# Altium PCB mSAS_BNC_fanout.PCBDOC
Units mm, origin at the board's own origin, x right, y up, seen from the top; angles counter-clockwise.
Board outline 107.36 x 57.36 mm, 2 copper layers (TopLayer, BottomLayer), stack 1.571 mm thick; 68 components, 47 nets, 208 pads, 796 vias.
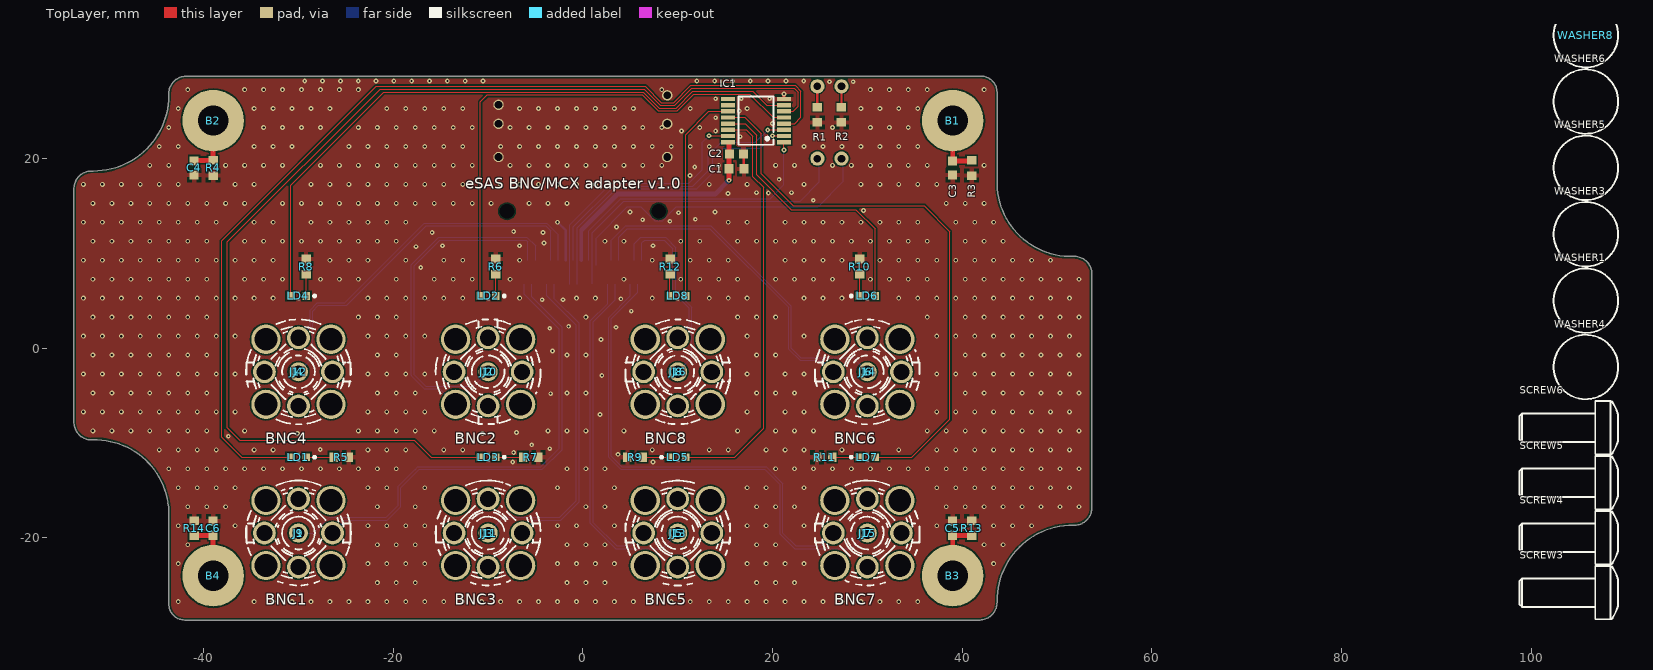
[diagram p0: TopLayer view]
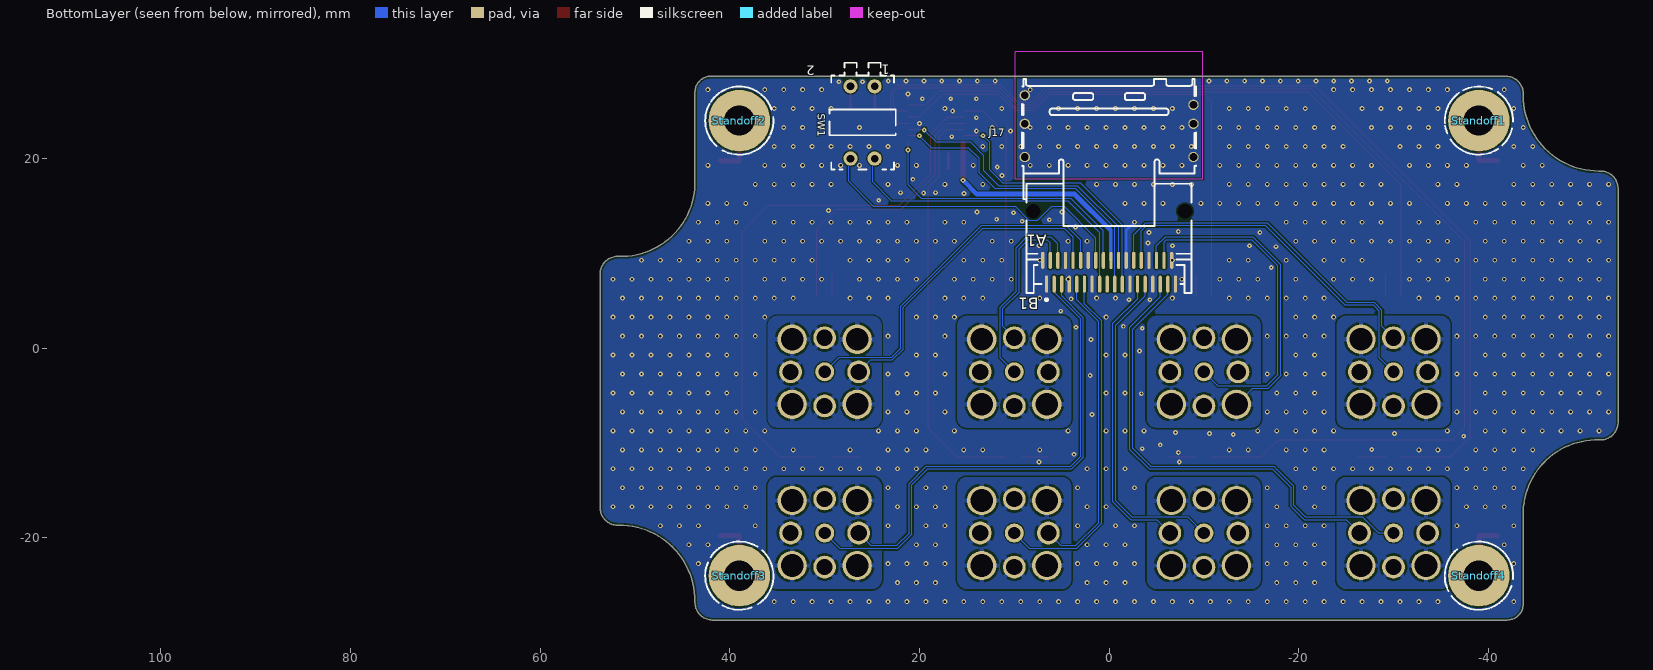
[diagram p1: BottomLayer view, seen from below]

## Layer stack, top to bottom
TopSolder: solder mask 0.0102, Solder Resist, Dk 3.5
TopLayer: signal copper 0.0356
Dielectric 3: prepreg 1.5, Dk 4.2
BottomLayer: signal copper 0.0356
BottomSolder: solder mask 0.0102, Solder Resist, Dk 3.5

## Board outline
-43.678,-26.986 -43.678,-17.288 -43.679,-17.262 ccw(c-51.476,-17.476) -51.691,-9.678 -51.727,-9.679 cw(c-51.825,-7.825) -53.671,-8.025 -53.678,-7.908 -53.678,16.907 -53.671,17.025 cw(c-51.826,16.825) -51.727,18.679 -51.651,18.677 ccw(c-51.651,26.651) -43.677,26.651 -43.679,26.728 cw(c-41.825,26.826) -42.025,28.671 -41.908,28.678 42,28.678 42.006,28.677 cw(c42,27) 43.677,27.006 43.678,27 43.678,17.302 43.679,17.262 ccw(c51.476,17.476) 51.691,9.679 51.727,9.679 cw(c51.826,7.825) 53.671,8.025 53.678,8 53.678,-16.907 53.679,-16.923 cw(c51.826,-16.825) 51.728,-18.679 51.717,-18.677 ccw(c51.651,-26.651) 43.678,-26.717 43.682,-26.825 cw(c41.825,-26.825) 42.025,-28.671 41.908,-28.678 -42,-28.678 -42.006,-28.677 cw(c-42,-27)

## Design rules (kind name [scope] priority, off if disabled: settings)
BoardOutlineClearance [All] p1: gap=0.254 ignorepadtopadclearanceinfootprint=FALSE except(0: Arc-SplitContinuation Track-SplitContinuation SMDPad-SplitContinuation THPad-SplitContinuation Via-SplitContinuation Fill-SplitContinuation Poly-SplitContinuation Region-SplitContinuation Text-SplitContinuation)
Clearance [All] p1: gap=0.152 ignorepadtopadclearanceinfootprint=FALSE
ComponentClearance ComponentClearance_standof_MH [HasFootprint('ETTINGER_005.13.103') vs HasFootprint('MTG270_500')] p1: gap=0.254 collisioncheckmode=3 verticalgap=-7 showdistances=FALSE
ComponentClearance ComponentClearance_BNC_SPX [HasFootprint('AMPHENOL_919-109J-51PX') vs HasFootprint('TYCO_5-1634506-1')] p2: gap=-10 collisioncheckmode=3 verticalgap=2540 showdistances=TRUE
ComponentClearance [All] p3: gap=0 collisioncheckmode=3 verticalgap=2540 showdistances=FALSE
DiffPairsRouting [InDifferentialPairClass('All Differential Pairs')] p1: maxlimit=0.127 minlimit=0.127 mostfreqgap=0.127 toplayer_minwidth=3.822 toplayer_maxwidth=3.822 toplayer_prefwidth=3.822 bottomlayer_minwidth=3.822 bottomlayer_maxwidth=3.822 bottomlayer_prefwidth=3.822 impedanceprofiledriven=TRUE impedanceprofileid={AE919443-835C-48A8-A9B8-3D3E97AE2A3C} impedanceprofilevalue=50.000000 maxuncoupledlength=12.7
FabricationTestPointUsage TestPointUsage [All] p1: valid=0 allowmultiple=FALSE
FabricationTestpoint Testpoint [All] p1: side=3 testpointundercomponent=TRUE minsize=1.016 maxsize=2.54 preferedsize=1.524 minholesize=0.508 maxholesize=1.016 preferedholesize=0.813 testpointgrid=0.025 allowsidetop=TRUE allowsidebottom=TRUE usegrid=TRUE gridtolerance=0
Height [All] p1: minheight=0 maxheight=40 prefheight=40
HoleSize [All] p1: absolutevalues=TRUE maxlimit=3.81 minlimit=0.025 maxpercent=80.000 minpercent=20.000
HoleToHoleClearance HoleToHoleClearance_standoff_to_MH [HasFootprint('MTG270_500') vs HasFootprint('ETTINGER_005.13.103')] p1: gap=-7 allowstackedmicrovias=TRUE
HoleToHoleClearance HoleToHoleClearance_BNC_ZPX [HasFootprint('AMPHENOL_919-109J-51PX') vs HasFootprint('TYCO_5-1634506-1')] p2: gap=-10 allowstackedmicrovias=TRUE
HoleToHoleClearance [All] p3: gap=0.025 allowstackedmicrovias=TRUE
MinimumSolderMaskSliver [All] p1: minsoldermaskwidth=0
PlaneClearance [All] p1: clearance=0.2
PlaneConnect [All] p1: planeconnectstyle=Direct reliefexpansion=0.508 reliefentries=4 reliefconductorwidth=0.254 reliefairgap=0.254
PolygonConnect PolygonConnect_eSAS [All vs HasFootprint('MOLEX_75783-0107')] p1: connectstyle=Direct reliefconductorwidth=0.254 reliefentries=4 polygonreliefangle="90 Angle" airgapwidth=0.254
PolygonConnect PolygonConnect_pad [(InPadClass('All Pads'))] p2: connectstyle=Relief reliefconductorwidth=0.5 reliefentries=4 polygonreliefangle="90 Angle" airgapwidth=0.254
PolygonConnect [All] p3: connectstyle=Direct reliefconductorwidth=0.254 reliefentries=4 polygonreliefangle="45 Angle" airgapwidth=0.254
RoutingVias [All] p1: holewidth=0.2 width=0.5 viastyle="Through Hole" minholewidth=0.2 minwidth=0.5 maxholewidth=0.711 maxwidth=1.27
SilkToSilkClearance [All] p1: silktosilkclearance=0
SilkToSolderMaskClearance SilkscreenOverComponentPads [IsPad] p1: minsilkscreentomaskgap=0 clearancetoexposedcopper=TRUE
SolderMaskExpansion [All] p1: expansion=0.051 istentingtop=FALSE
SupplyNets "Schematic Supply Nets" [InNet('AFE0_CSN1')] p1 off: voltage=0.000
SupplyNets "Schematic Supply Nets_2" [InNet('GND')] p2 off: voltage=0.000
ViasUnderSMD [All] p1 off: allowed=FALSE
Width [All] p1: maxlimit=1.27 minlimit=0.127 preferedwidth=0.127
18 further rules are at their usual default settings.

## Components (designator, comment, footprint, x,y, rotation, side; value= is the part's Value field where it differs from the comment)
B1 "Plated Hole" MTG270_500 39,24 r0 top
B2 "Plated Hole" MTG270_500 -39,24 r0 top
B3 "Plated Hole" MTG270_500 39,-24 r0 top
B4 "Plated Hole" MTG270_500 -39,-24 r0 top
C1 "100nF" CAPC1608X87N 16.2,18.9 r180 top
C2 "22uF" CAPC1608X90N 16.2,20.5 r180 top
C3 "100nF" CAPC1608X90N 39,19 r270 top
C4 "100nF" CAPC1608X90N -41,19 r270 top
C5 "100nF" CAPC1608X90N 39,-19 r90 top
C6 "100nF" CAPC1608X90N -39,-19 r90 top
IC1 "CD74HC4094PW" SOP65P640X120-16N 18.25,24 r180 top
J1 "BNC" TYCO_5-1634506-1 -30,-19.5 r180 top
J2 "BNC" TYCO_5-1634506-1 -10,-2.5 r270 top
J3 "BNC" TYCO_5-1634506-1 -10,-19.5 r180 top
J4 "BNC" TYCO_5-1634506-1 -30,-2.5 r180 top
J5 "BNC" TYCO_5-1634506-1 10,-19.5 r180 top
J6 "BNC" TYCO_5-1634506-1 30,-2.5 r180 top
J7 "BNC" TYCO_5-1634506-1 30,-19.5 r180 top
J8 "BNC" TYCO_5-1634506-1 10,-2.5 r180 top
J9 "MCX" AMPHENOL_919-109J-51PX -30,-19.5 r45 top
J10 "MCX" AMPHENOL_919-109J-51PX -10,-2.5 r45 top
J11 "MCX" AMPHENOL_919-109J-51PX -10,-19.5 r45 top
J12 "MCX" AMPHENOL_919-109J-51PX -30,-2.5 r45 top
J13 "MCX" AMPHENOL_919-109J-51PX 10,-19.5 r45 top
J14 "MCX" AMPHENOL_919-109J-51PX 30,-2.5 r45 top
J15 "MCX" AMPHENOL_919-109J-51PX 30,-19.5 r45 top
J16 "MCX" AMPHENOL_919-109J-51PX 10,-2.5 r45 top
J17 "iPass™" MOLEX_75783-0107 0,8 r0 bottom locked
LD1 "Green" LED_KINGBRIGHT_KP-1608CGCK -30,-11.5 r180 top
LD2 "Green" LED_KINGBRIGHT_KP-1608CGCK -10,5.5 r180 top
LD3 "Green" LED_KINGBRIGHT_KP-1608CGCK -10,-11.5 r180 top
LD4 "Green" LED_KINGBRIGHT_KP-1608CGCK -30,5.5 r180 top
LD5 "Green" LED_KINGBRIGHT_KP-1608CGCK 10,-11.5 r0 top
LD6 "Green" LED_KINGBRIGHT_KP-1608CGCK 30,5.5 r0 top
LD7 "Green" LED_KINGBRIGHT_KP-1608CGCK 30,-11.5 r0 top
LD8 "Green" LED_KINGBRIGHT_KP-1608CGCK 10,5.5 r0 top
MECH1 "61000-007" GENERIC_MECH 88.569,-123.98 r90 top
R1 "1k" RESC1608X55N 24.73,24.61 r270 top
R2 "1k" RESC1608X55N 27.27,24.61 r270 top
R3 "1M" RESC1608X55N 41,19 r270 top
R4 "1M" RESC1608X55N -39,19 r270 top
R5 "750" RESC1608X55N -25.5,-11.5 r0 top
R6 "750" RESC1608X55N -9.2,8.6 r90 top
R7 "750" RESC1608X55N -5.5,-11.5 r0 top
R8 "750" RESC1608X55N -29.2,8.6 r90 top
R9 "750" RESC1608X55N 5.5,-11.5 r180 top
R10 "750" RESC1608X55N 29.2,8.6 r90 top
R11 "750" RESC1608X55N 25.5,-11.5 r180 top
R12 "750" RESC1608X55N 9.2,8.6 r90 top
R13 "1M" RESC1608X55N 41,-19 r90 top
R14 "1M" RESC1608X55N -41,-19 r90 top
SCREW3 "M3x8" BOSSARD_BN5687-3061606_h 106.775,-25.791 r0 top
SCREW4 "M3x8" BOSSARD_BN5687-3061606_h 106.775,-19.991 r0 top
SCREW5 "M3x8" BOSSARD_BN5687-3061606_h 106.775,-14.191 r0 top
SCREW6 "M3x8" BOSSARD_BN5687-3061606_h 106.775,-8.391 r0 top
Standoff1 "=Value" ETTINGER_005.13.103 -39,24 r180 bottom
Standoff2 "=Value" ETTINGER_005.13.103 39,24 r180 bottom
Standoff3 "=Value" ETTINGER_005.13.103 39,-24 r180 bottom
Standoff4 "=Value" ETTINGER_005.13.103 -39,-24 r180 bottom
SW1 "Switch" SW_OMRON_A6DR-2101 26,23.8 r270 bottom locked
WASHER1 "D6xd3.2" BOSSARD_BN83728-8243964_v 105.785,5.009 r270 top
WASHER2 "D6xd3.2" BOSSARD_BN83728-8243964_v 105.785,47.009 r270 top
WASHER3 "D6xd3.2" BOSSARD_BN83728-8243964_v 105.785,12.009 r270 top
WASHER4 "D6xd3.2" BOSSARD_BN83728-8243964_v 105.785,-1.991 r270 top
WASHER5 "D6xd3.2" BOSSARD_BN83728-8243964_v 105.785,19.009 r270 top
WASHER6 "D6xd3.2" BOSSARD_BN83728-8243964_v 105.785,26.009 r270 top
WASHER7 "D6xd3.2" BOSSARD_BN83728-8243964_v 105.785,40.009 r270 top
WASHER8 "D6xd3.2" BOSSARD_BN83728-8243964_v 105.785,33.009 r270 top

## Footprints (in the part's own frame and the unit in brackets; to place one, negate y for a bottom-side part, rotate by r counter-clockwise, add the part's x,y. Pads: shape width x height; smd on the part's side, far side on the other; paste and mask are expansions set on the pad)
AMPHENOL_919-109J-51PX [mm] "50 Ohm, RF Connector, MCX Straight PCB Receptacle Jack"
  round 1.9 hole 1.2: 1(0,0)
  round 2.4 hole 1.7: 2(-2.54,-2.54) 2(-2.54,2.54) 2(2.54,2.54) 2(2.54,-2.54)
  silkscreen extent -3,-3 3,3, body extent -3,-3 3,3, height 6.06
BOSSARD_BN5687-3061606_h [mm] "M3 L=8mm Hexalobular Socket Pan Head Screw, Fully Threaded - Stainless Steel A2"
  silkscreen extent -8,-2.8 2.4,2.8, body extent -8,-2.8 2.4,2.8, height 2.8
BOSSARD_BN83728-8243964_v [mm] "Waved Spring Washer for M3 Screw - Steel 440-520 HV - Zinc Plated Blue"
  silkscreen extent -3.4,-3.4 3.4,3.4, body extent -3,-3 3,3, height 0.4
CAPC1608X87N [mm] "Chip Capacitor, Body 1.6x0.8mm IPC Medium Density"
  rect 0.95x1 smd: 1(-0.8,0) 2(0.8,0)
  body extent -0.87,-0.47 0.88,0.48, height 0.87
CAPC1608X90N [mm] "Chip Capacitor, Body 1.6x0.8mm IPC Medium Density"
  rect 0.95x0.95 smd: 1(-0.75,0) 2(0.75,0)
  body extent -0.85,-0.45 0.85,0.45, height 0.9
ETTINGER_005.13.103 [mm] "Standoff Nickel-Plated Brass M/F AF5.5x10 F=M3x6.5 M=M3x6"
  round 6.5 hole 3.2: 1(0,0)
  silkscreen extent -3.6,-3.6 3.6,3.6, body extent -3.18,-2.75 3.18,2.75, height 10
GENERIC_MECH [mm]
LED_KINGBRIGHT_KP-1608CGCK [mm] "SMT Green LED, Case 0603, Body L 1.60mm x W 0.80mm x H 1.10mm"
  rect 0.8x0.8 smd: 1(-0.825,0) 2(0.825,0)
  silkscreen extent -1.83,-0.4 0.08,0.4, body extent -0.8,-0.4 0.8,0.4, height 1.1
MOLEX_75783-0107 [mm] "36 Circuit, Right Angle , Internal Assembly, iPass™ I/O Surface Mount Receptacle with Left Key Shell"
  oval 0.35x1.8 smd: A1(7,-1.255) A2(6.2,-1.255) A3(5.4,-1.255) A4(4.6,-1.255) A5(3.8,-1.255) A6(3,-1.255) A7(2.2,-1.255) A8(1.4,-1.255) A9(0.6,-1.255) A10(-0.2,-1.255) A11(-1,-1.255) A12(-1.8,-1.255) A13(-2.6,-1.255) A14(-3.4,-1.255) A15(-4.2,-1.255) A16(-5,-1.255) A17(-5.8,-1.255) A18(-6.6,-1.255) B1(6.6,1.255) B2(5.8,1.255) B3(5,1.255) B4(4.2,1.255) B5(3.4,1.255) B6(2.6,1.255) B7(1.8,1.255) B8(1,1.255) B9(0.2,1.255) B10(-0.6,1.255) B11(-1.4,1.255) B12(-2.2,1.255) B13(-3,1.255) B14(-3.8,1.255) B15(-4.6,1.255) B16(-5.4,1.255) B17(-6.2,1.255) B18(-7,1.255)
  round 0.5 hole 1.55 unplated mask+0.525: MTG1(-8,-6.435) MTG2(8,-6.435)
  round 1.1 hole 0.8: SHELL1(-8.9,-12.155) SHELL2(-8.9,-15.655) SHELL3(-8.9,-17.655) SHELL4(8.9,-12.155) SHELL5(8.9,-15.655) SHELL6(8.9,-18.655)
  TopLayer keep-out lines w0.1: -9.9,-9.835 9.9,-9.835 9.9,-23.235 -9.9,-23.235 -9.9,-9.835
  silkscreen extent -9.17,-20.41 9.18,3.02, body extent -9.17,-20.41 9.18,2.17, height 8.62
MTG270_500 [mm] "Plated Through Hole: Hole Dia.=2.7mm Pad Dia.=5.0mm"
  round 5 hole 2.7: 1(0,0)
RESC1608X55N [mm] "Chip Resistor, EIA 0603, Metric 1608, Body 1.6x0.8mm, IPC Medium Density"
  rect 0.9x1 smd: 1(-0.8,0) 2(0.8,0)
  body extent -0.87,-0.47 0.88,0.48, height 0.55
SOP65P640X120-16N [mm] "SOP, 0.65mm pitch; 16 pin, 4.40mm W X 5.00mm L X 1.20mm H body IPC Medium Density"
  rect 1.45x0.45 smd: 1(-2.95,2.275) 2(-2.95,1.625) 3(-2.95,0.975) 4(-2.95,0.325) 5(-2.95,-0.325) 6(-2.95,-0.975) 7(-2.95,-1.625) 8(-2.95,-2.275) 9(2.95,-2.275) 10(2.95,-1.625) 11(2.95,-0.975) 12(2.95,-0.325) 13(2.95,0.325) 14(2.95,0.975) 15(2.95,1.625) 16(2.95,2.275)
  silkscreen extent -1.85,-2.55 1.85,2.55, body extent -3.12,-2.55 3.12,2.55, height 1.2
SW_OMRON_A6DR-2101 [mm]
  round 1.5 hole 0.8: 1(-3.81,1.27) 2(-3.81,-1.27) 3(3.81,-1.27) 4(3.81,1.27)
  silkscreen extent -6.3,-3.5 4.95,3.5, body extent -4.95,-3.32 4.95,3.32, height 10.2
TYCO_5-1634506-1 [mm] "50 Ohm BNC PCB Receptacle (Jack), Post Terminal, 4 Legs"
  round 2 hole 1.3: 1(0,0)
  round 3.1 hole 2.4: 2(-3.43,3.43) 2(-3.43,-3.43) 2(3.43,3.43) 2(3.43,-3.43)
  silkscreen extent -5.53,-5.53 5.53,5.53, body extent -5.5,-5.5 5.5,5.5, height 16.7

## Part data
B1 B2 B3 B4: library part PLATED_HOLE2.7_PAD5.0, "Single Terminal Socket", Author="CERN DEM JMW", Component Type="Standard (No BOM)", ComponentHeight=0mm, CreateDate=27.09.2011, Family="Plated Hole", HelpURL=Undefined, LatestRevisionDate=27.09.2011, Mounted=No, PackageDescription="Plated Through Hole: Hole Dia.=2.7mm Pad Dia.=5.0mm", Part Description="Plated Through Hole: Hole Dia.=2.7mm Pad Dia.=5.0mm", Part Number=PLATED_HOLE2.7_PAD5.0, Pin Count=1, Sense=No, SMD=No, Socket=No, Status=None
C1: library part CC0603_100NF_50V_10%_X7R, "Non-polarised capacitor", Case=0603, Manufacturer=GENERIC, Manufacturer1 ComponentHeight=0.87mm, Manufacturer1 Example=PHYCOMP, Manufacturer1 Part Number=223858615649, Tolerance=±10%, Voltage=50V, Author="CERN DEM JLC", Component Type=Standard, CreateDate=03.12.2007, HelpURL=\\cern.ch\dfs\Applications\Altium\Datasheets\CC0603_X7R_PHYCOMP.pdf, LatestRevisionDate=03.12.2007, Manufacturer Part Number=CC0603_100NF_50V_10%_X7R, Mounted=Yes, Part Description="SMD Multilayer Chip Ceramic Capacitor", Part Number=CC0603_100NF_50V_10%_X7R, Pin Count=2, Sense=No, SMD=Yes, Socket=No, Status=Preferred, TC=X7R
C2: library part CC0603_22UF_10V_20%_X5R, "Non-polarised capacitor", Case=0603, Manufacturer=GENERIC, Manufacturer1 ComponentHeight=0.9mm, Manufacturer1 Example=TDK, Manufacturer1 Part Number=C1608X5R1A226M080, Tolerance=±20%, Voltage=10V, Author="CERN DEM BC", Component Type=Standard, CreateDate=03.12.2020, HelpURL=\\cern.ch\dfs\Applications\Altium\Datasheets\CC0603_X5R_TDK_C.pdf, LatestRevisionDate=03.12.2020, Manufacturer Part Number=CC0603_22UF_10V_20%_X5R, Mounted=Yes, Part Description="SMD Multilayer Chip Ceramic Capacitor", Part Number=CC0603_22UF_10V_20%_X5R, Pin Count=2, Sense=No, SMD=Yes, Socket=No, Status=None, TC=X5R
C3 C4 C5 C6: library part CC0603_100NF_100V_10%_X7R, "Non-polarised capacitor", Case=0603, Manufacturer=GENERIC, Manufacturer1 ComponentHeight=0.9mm, Manufacturer1 Example=MURATA, Manufacturer1 Part Number=GRM188R72A104KA35D, Tolerance=±10%, Voltage=100V, Author="CERN DEM JLC", Component Type=Standard, CreateDate=11.12.2013, HelpURL=\\cern.ch\dfs\Applications\Altium\Datasheets\CC0603_MURATA_GRM188R72A104KA35D.pdf, LatestRevisionDate=11.12.2013, Manufacturer Part Number=CC0603_100NF_100V_10%_X7R, Mounted=Yes, Part Description="SMD Multilayer Chip Ceramic Capacitor", Part Number=CC0603_100NF_100V_10%_X7R, Pin Count=2, Sense=No, SMD=Yes, Socket=No, Status=None, TC=X7R
IC1: "High−Speed CMOS Logic, 8−Stage Shift and Store Bus Register, Three−State", Case=TSSOP16, Manufacturer="TEXAS INSTRUMENTS", Author="CERN DEM MR", Bonding=No, Component Type=Standard, ComponentHeight=1.2mm, CreateDate=08.03.2016, Device=CD74HC4094PW, HelpURL=\\cern.ch\dfs\Applications\Altium\Datasheets\CD74HC4094PW.pdf, LatestRevisionDate=08.03.2016, Manufacturer Part Number=CD74HC4094PW, Mounted=Yes, PackageDescription="SOP, 0.65mm Pitch; 16 Pin, 4.40mm W X 5.00mm L X 1.20mm H body, IPC Medium Density", Part Description="High−Speed CMOS Logic, 8−Stage Shift and Store Bus Register, Three−State", Part Number=CD74HC4094PW, Pin Count=16, PressFit=No, Sense=No, SMD=Yes, Socket=No
J1 J2 J3 J4 J5 J6 J7 J8: library part TYCO_5-1634506-1, Manufacturer="TYCO ELECTRONICS", Manufacturer Part Number=5-1634506-1, Author="CERN DEM JLC", Component Type=Standard, ComponentHeight=16.7mm, CreateDate=14.02.2011, Family=BNC, HelpURL=\\cern.ch\dfs\Applications\Altium\Datasheets\TYCO_5-1634506-1.pdf, LatestRevisionDate=14.02.2011, Mounted=Yes, Part Description="50 Ohms BNC PCB Straight Socket", Part Number=TYCO_5-1634506-1, Pin Count=2, PressFit=No, Sense=No, SMD=No, Socket=No, Status=None
J9 J10 J11 J12 J13 J14 J15 J16: library part AMPHENOL_919-109J-51PX, Manufacturer=AMPHENOL, Manufacturer Part Number="919-109J-51PX (MCX6251B1-3GT30G-50)", Author="CERN DEM BC", Component Type=Standard, ComponentHeight=6.06mm, CreateDate=31.01.2019, Family=MCX, HelpURL=\\cern.ch\dfs\Applications\Altium\Datasheets\AMPHENOL_919-109J-51PX.pdf, LatestRevisionDate=31.01.2019, Mounted=Yes, Part Description="50 Ohm, RF Connector, MCX Straight PCB Receptacle Jack", Part Number=AMPHENOL_919-109J-51PX, Pin Count=5, PressFit=No, Sense=No, SMD=No, Socket=No, Status=None
J17: library part MOLEX_75783-0107, "36 Circuit, Right Angle , Internal Assembly, iPass™ I/O Surface Mount Receptacle with Left Key Shell", Manufacturer=MOLEX, Manufacturer Part Number="75783-0107 / 75783-0136", Part Number="MOLEX 75783-0107 / 75783-0136", Author="CERN DEM JLC", Component Type=Standard, ComponentHeight=8.47mm, CreateDate=12.11.2014, Family=iPass™, HelpURL=\\cern.ch\dfs\Applications\Altium\Datasheets\MOLEX_75783-0107.pdf, LatestRevisionDate=12.11.2014, Mounted=Yes, Part Description="36 Circuit, Right Angle , Internal Assembly, iPass™ I/O Surface Mount Receptacle with Left Key Shell", Pin Count=42, PressFit=No, Sense=No, SMD=Yes, Socket=No, Status=None
LD1 LD2 LD3 LD4 LD5 LD6 LD7 LD8: library part LED_KINGBRIGHT_KP-1608CGCK, "LED Green 1C 2A", Case=0603, Manufacturer=KINGBRIGHT, Manufacturer Part Number=KP-1608CGCK, Author="CERN DEM HF", Bonding=No, Color=Green, Component Type=Standard, ComponentHeight=1.1mm, CreateDate=01.10.2021, HelpURL=\\cern.ch\dfs\Applications\Altium\Datasheets\LED_KINGBRIGHT_KP-1608CGCK.pdf, LatestRevisionDate=01.10.2021, Mounted=Yes, PackageDescription="SMT Green LED, Case 0603, Body L 1.60mm x W 0.80mm x H 1.10mm", Part Description="1.6x0.8mm SMD Chip Green LED Lamp", Part Number=LED_KINGBRIGHT_KP-1608CGCK, Pin Count=2, PressFit=No, Sense=No, SMD=Yes, Socket=No
MECH1: library part Generic_mechanical, "PCB Solder Side Cover, 3 U, 100 mm x 160 mm, 55°C Schroff insulating plate", Manufacturer=Schroff, Author=GK, Component Type=Standard, ComponentHeight=generic, CreateDate=28.10.2019, LatestRevisionDate=28.10.2019, Manufacturer Part Number=61000-007, Mounted=Yes, PackageDescription=generic, Part Description="PCB Solder Side Cover, 3 U, 100 mm x 160 mm, 55°C Schroff insulating plate", Part Number=61000-007, Pin Count=0, PressFit=No, Sense=No, SMD=No, Socket=No, Status=None
R1 R2: library part R0603_1K_1%_0.1W_100PPM, "Resistor - 1%", Case=0603, Manufacturer=GENERIC, Manufacturer1 ComponentHeight=0.55mm, Manufacturer1 Example="NIC COMPONENT", Manufacturer1 Part Number=NRC06F1001TRF, Power=0.1W, Tolerance=±1%, Author="CERN DEM JLC", Component Type=Standard, CreateDate=03.12.2007, HelpURL=\\cern.ch\dfs\Applications\Altium\Datasheets\R0603_NIC_NRC.pdf, LatestRevisionDate=13.03.2008, Manufacturer Part Number=R0603_1K_1%_0.1W_100PPM, Mounted=Yes, Part Description="General Purpose Thick Film Chip Resistor", Part Number=R0603_1K_1%_0.1W_100PPM, Pin Count=2, PressFit=No, Sense=No, SMD=Yes, Socket=No, Status=Preferred, TC=±100ppm/°C
R3 R4 R13 R14: library part R0603_1M_1%_0.1W_100PPM, "Resistor - 1%", Case=0603, Manufacturer=GENERIC, Manufacturer1 ComponentHeight=0.55mm, Manufacturer1 Example="NIC COMPONENT", Manufacturer1 Part Number=NRC06F1004TRF, Power=0.1W, Tolerance=±1%, Author="CERN DEM JLC", Component Type=Standard, CreateDate=03.12.2007, HelpURL=\\cern.ch\dfs\Applications\Altium\Datasheets\R0603_NIC_NRC.pdf, LatestRevisionDate=13.03.2008, Manufacturer Part Number=R0603_1M_1%_0.1W_100PPM, Mounted=Yes, Part Description="General Purpose Thick Film Chip Resistor", Part Number=R0603_1M_1%_0.1W_100PPM, Pin Count=2, PressFit=No, Sense=No, SMD=Yes, Socket=No, Status=Preferred, TC=±100ppm/°C
R5 R6 R7 R8 R9 R10 R11 R12: library part R0603_750R_1%_0.1W_100PPM, "Resistor - 1%", Case=0603, Manufacturer=GENERIC, Manufacturer1 ComponentHeight=0.55mm, Manufacturer1 Example="NIC COMPONENT", Manufacturer1 Part Number=NRC06F7500TRF, Power=0.1W, Tolerance=±1%, Author="CERN DEM JLC", Component Type=Standard, CreateDate=03.12.2007, HelpURL=\\cern.ch\dfs\Applications\Altium\Datasheets\R0603_NIC_NRC.pdf, LatestRevisionDate=13.03.2008, Manufacturer Part Number=R0603_750R_1%_0.1W_100PPM, Mounted=Yes, Part Description="General Purpose Thick Film Chip Resistor", Part Number=R0603_750R_1%_0.1W_100PPM, Pin Count=2, PressFit=No, Sense=No, SMD=Yes, Socket=No, Status=Preferred, TC=±100ppm/°C
SCREW3 SCREW4 SCREW5 SCREW6: library part BOSSARD_BN5687-3061606_h, "Screw", Manufacturer=BOSSARD, Manufacturer Part Number="BN5687 Art.3061606", Author="CERN DEM JLC", Component Type=Mechanical, ComponentHeight=5.6mm, CreateDate=07.02.2013, HelpURL=\\cern.ch\dfs\Applications\Altium\Datasheets\BOSSARD_BN5687-3061606.pdf, LatestRevisionDate=07.02.2013, Mounted=Yes, PackageDescription="M3 L=8mm Hexalobular Socket Pan Head Screw, Fully Threaded - Stainless Steel A2", Part Description="M3 L=8mm Hexalobular Socket Pan Head Screw, Fully Threaded, Stainless Steel A2", Part Number=BOSSARD_BN5687-3061606_h, Pin Count=0, PressFit=No, Sense=No, SMD=No, Socket=No, Status=None
Standoff1 Standoff2 Standoff3 Standoff4: library part ETTINGER_005.13.103, "Standoff Male-Female", Manufacturer=ETTINGER, Manufacturer Part Number=005.13.103, Author="CERN DEM HF", Component Type=Mechanical, ComponentHeight=10mm, CreateDate=17.05.2023, HelpURL=\\cern.ch\dfs\Applications\Altium\Datasheets\ETTINGER_005.13.103.pdf, LatestRevisionDate=17.05.2023, Mounted=Yes, PackageDescription="Standoff Nickel-Plated Brass M/F AF5.5x10 F=M3x6.5 M=M3x6", Part Description="Standoff Nickel-Plated Brass M/F AF5.5x10 F=M3x6.5 M=M3x6", Part Number=ETTINGER_005.13.103, Pin Count=1, PressFit=No, Sense=No, SMD=No, Socket=No, Status=None
SW1: library part SW_OMRON_A6DR-2101, "2 Ways SPST DIP Switch", Manufacturer=OMRON, Manufacturer Part Number=A6DR-2101, Part Number=SW_OMRON_A6FR-2101, Component Type=Standard, ComponentHeight=7.6mm, Family=Switch, HelpURL=\\cern.ch\dfs\Applications\Altium\Datasheets\SW_OMRON_A6DR-4100.pdf, Mounted=Yes, PackageDescription="Pitch 2.54mm, Body 6.64x9.9mm, 4 Ways SPST Sealed Piano DIP Switch, OMRON A6DR", Part Description="2 Ways SPST Sealed Piano DIP Switch, Contact Rating 25mA 24VDC", Pin Count=4, PressFit=No, Sense=No, SMD=No, Socket=No, Status=None
WASHER1 WASHER2 WASHER3 WASHER4 WASHER5 WASHER6 WASHER7 WASHER8: library part BOSSARD_BN83728-8243964_v, "Washer", Manufacturer=BOSSARD, Manufacturer Part Number="BN83728 Art.8243964", Author="CERN DEM JLC", Component Type=Mechanical, ComponentHeight=0.4mm, CreateDate=27.04.2017, HelpURL=\\cern.ch\dfs\Applications\Altium\Datasheets\BOSSARD_BN83728-8243964.pdf, LatestRevisionDate=27.04.2017, Mounted=Yes, PackageDescription="Waved Spring Washer for M3 Screw, Steel 440-520 HV, Zinc Plated Blue", Part Description="Waved Spring Washer for M3 Screw - Steel 440-520 HV - Zinc Plated Blue", Part Number=BOSSARD_BN83728-8243964_v, Pin Count=0, PressFit=No, Sense=No, SMD=No, Socket=No, Status=None

## Via types
v1: diameter 0.508, hole 0.254, TopLayer to BottomLayer, 712 vias
v2: diameter 0.5, hole 0.2, TopLayer to BottomLayer, 84 vias

## Nets (pads, with @x,y where several pads share a name; then routed paths per layer and width w, separated by ;. In a path a pad name is that pad's centre, name@x,y a point inside that pad or via, vN(x,y) a via of type N, cw(c..) or ccw(c..) an arc to the next point about the centre after c; other vN are vias at no path point)
AFE0_CSN0: IC1.15 J17.B11 | length 28.6
  TopLayer w0.127: v2(13.3,22.4) 13.325,22.375 IC1.15
  BottomLayer w0.127: J17.B11 -1.4,13 2.989,17.389 11.189,17.389 12.6,18.8 12.6,21.7 v2(13.3,22.4)
AFE0_CSN1: C1.2 C2.2 IC1.16 J17.A10 | length 24.8
  TopLayer w0.508: v2(15.4,17.7) C1.2 IC1.16@15.4,21.625
  BottomLayer w0.368: J17.A10 -0.2,12.4
  BottomLayer w0.508: -0.13,12.47 3.649,16.249 13.949,16.249 v2(15.4,17.7)
AFE0_ID0: J17.B8 SW1.4 | length 33.2
  BottomLayer w0.127: J17.B8@0.993,6.779 0.993,12.193 4.3,15.5 22.9,15.5 24.94,17.54 24.94,19.19
AFE0_ID1: J17.A8 SW1.3 | length 34.2
  BottomLayer w0.127: J17.A8@1.4,8.765 J17.A8 1.4,11.6 4.7,14.9 6.1,14.9 7.556,13.444 8.41,13.444 9.866,14.9 24.8,14.9 27.48,17.58 27.48,19.19
AFE0_MISO0: J17.B9
AFE0_MISO1: IC1.1 J17.A9 | length 30.2
  TopLayer w0.127: v2(21.2,20.9) IC1.1
  BottomLayer w0.127: J17.A9 0.6,12.4 3.979,15.779 19.431,15.779 19.479,15.779 19.742,15.779 21.2,17.238 v2(21.2,20.9)
AFE0_MOSI01: IC1.2 J17.B10 | length 32.7
  TopLayer w0.127: v2(20,22.4) 20.025,22.375 IC1.2
  BottomLayer w0.127: J17.B10 -0.6,12.7 3.5,16.8 12,16.8 13.7,18.5 13.7,20 14.8,21.1 18.7,21.1 v2(20,22.4)
AFE0_SCLK01: IC1.3 J17.A11 | length 30.9
  TopLayer w0.127: v2(19.5,23) 19.525,23.025 IC1.3
  BottomLayer w0.127: J17.A11 -1,12.8 3.279,17.079 11.579,17.079 13.2,18.7 13.2,20.3 14.6,21.7 18.2,21.7 v2(19.5,23)
DAC_OUT1_N: J1.2 J9.2 J17.B16 | length 47.8
  BottomLayer w0.127: J9.2@-26.408,-19.5 -25.061,-18.153 -20.635,-18.153 -19.187,-16.705 -19.187,-14.705 -17.282,-12.8 -4.3,-12.8 -2.2,-10.7 -2.2,2.206 -5.4,5.406 J17.B16
DAC_OUT1_P: J1.1 J9.1 J17.B17 | length 51.3
  BottomLayer w0.127: J1.1 -28.428,-19.5 -26.777,-17.849 -20.762,-17.849 -19.492,-16.579 -19.492,-14.579 -17.721,-12.808 -17.685,-12.808 -17.398,-12.521 -4.421,-12.521 -2.479,-10.579 -2.479,1.979 -6.2,5.7 J17.B17
DAC_OUT2_N: J2.2 J10.2 J17.A16 | length 33.8
  BottomLayer w0.127: J2.2@-13.43,-5.93 -15.08,-4.279 -16.716,-4.279 -18.079,-2.916 -18.079,-2.9 -18.1,-2.879 -18.1,8.8 -15.2,11.7 -5.904,11.7 -5,10.796 J17.A16
DAC_OUT2_P: J2.1 J10.1 J17.A17 | length 35.6
  BottomLayer w0.127: J2.1 -11.5,-4 -16.6,-4 -17.8,-2.8 -17.8,8.705 -15.105,11.4 -6,11.4 -5.8,11.2 J17.A17
DAC_OUT3_N: J3.2 J11.2 J17.B13 | length 31.4
  BottomLayer w0.127: J11.2@-6.408,-19.5 -5.061,-18.153 -2.353,-18.153 -0.4,-16.2 -0.4,2.6 -3,5.2 J17.B13
DAC_OUT3_P: J3.1 J11.1 J17.B14 | length 34.9
  BottomLayer w0.127: J3.1 -8.349,-17.849 -2.449,-17.849 -0.679,-16.079 -0.679,2.4 -3.8,5.52 J17.B14
DAC_OUT4_N: J4.2 J12.2 J17.A13 | length 36.6
  BottomLayer w0.127: J12.2@-30,1.092 -28.781,2.311 -28.781,4.019 -28,4.8 -25.1,4.8 -16.721,13.179 -3.802,13.179 -2.6,11.977 J17.A13
DAC_OUT4_P: J4.1 J12.1 J17.A14 | length 39.2
  BottomLayer w0.127: J4.1 -28.5,-1 -28.5,3.9 -27.9,4.5 -24.905,4.5 -16.505,12.9 -3.918,12.9 -3.4,12.382 J17.A14
DAC_OUT5_N: J5.2 J13.2 J17.B5 | length 33
  BottomLayer w0.127: J17.B5 3.4,5.1 1.1,2.8 1.1,-18.4 3.547,-20.847 5.061,-20.847 J13.2@6.408,-19.5
DAC_OUT5_P: J5.1 J13.1 J17.B6 | length 37
  BottomLayer w0.127: J17.B6 2.6,4.695 0.8,2.895 0.8,-18.495 3.456,-21.151 8.349,-21.151 J13.1
DAC_OUT6_N: J6.2 J14.2 J17.A5 | length 34.3
  BottomLayer w0.127: J17.A5 3.8,11.7 4.7,12.6 13.4,12.6 21.7,4.3 21.7,-0.1 22.9,-1.3 25.208,-1.3 J14.2@26.408,-2.5
DAC_OUT6_P: J6.1 J14.1 J17.A6 | length 38.7
  BottomLayer w0.127: J17.A6 3,11.4 4.5,12.9 13.495,12.9 21.979,4.416 21.979,4.121 22,4.1 22,0 23,-1 28.5,-1 J6.1
DAC_OUT7_N: J7.2 J15.2 J17.B2 | length 50.3
  BottomLayer w0.127: J17.B2 5.8,5.9 2.979,3.079 2.979,-11.384 4.116,-12.521 19.321,-12.521 21.1,-14.3 21.1,-19.505 22.442,-20.847 25.061,-20.847 J15.2@26.408,-19.5
DAC_OUT7_P: J7.1 J15.1 J17.B3 | length 54.2
  BottomLayer w0.127: J17.B3 5,5.5 2.7,3.2 2.7,-11.5 4,-12.8 19.205,-12.8 20.821,-14.416 20.821,-19.621 22.351,-21.151 28.349,-21.151 J15.1
DAC_OUT8_N: J8.2 J16.2 J17.A2 | length 16.3
  BottomLayer w0.127: J17.A2 6.2,11.1 6.5,11.4 8.6,11.4 9.5,10.5 9.5,5.9 11.2,4.2 11.2,2.292 J16.2@10,1.092
DAC_OUT8_P: J8.1 J16.1 J17.A3 | length 21.3
  BottomLayer w0.127: J17.A3 5.4,11 6.079,11.679 8.721,11.679 9.8,10.6 9.8,6 11.5,4.3 11.5,-1 J8.1
GND: C1.1 C2.1 C3.2 C4.2 C5.2 C6.2 IC1.8 J17.A1 J17.A4 J17.A7 J17.A12 J17.A15 J17.A18 J17.B1 J17.B4 J17.B7 J17.B12 J17.B15 J17.B18 J17.SHELL1 J17.SHELL2 J17.SHELL3 J17.SHELL4 J17.SHELL5 J17.SHELL6 R1.2 R2.2 R3.2 R4.2 R5.2 R6.2 R7.2 R8.2 R9.2 R10.2 R11.2 R12.2 R13.2 R14.2 | length 6.5
  TopLayer w0.254: C2.1 16.95,18.95 C1.1 ; IC1.8 v2(21.2,26.8)
  BottomLayer w0.254: v1(-2.68,13.27) -1.8,12.39 -1.8,12.2 -1.8,9.98 J17.A12
  other v1: -42.68,-26.73 -34.68,-26.73 -32.68,-26.73 -30.68,-26.73 -28.68,-26.73 -26.68,-26.73 -24.68,-26.73 -22.68,-26.73 -20.68,-26.73 -18.68,-26.73 -16.68,-26.73 -14.68,-26.73 -12.68,-26.73 -10.68,-26.73 -8.68,-26.73 -6.68,-26.73 -4.68,-26.73 -2.68,-26.73 -0.68,-26.73 1.32,-26.73 3.32,-26.73 5.32,-26.73 7.32,-26.73 9.32,-26.73 11.32,-26.73 13.32,-26.73 15.32,-26.73 17.32,-26.73 19.32,-26.73 21.32,-26.73 23.32,-26.73 25.32,-26.73 27.32,-26.73 29.32,-26.73 31.32,-26.73 33.32,-26.73 35.32,-26.73 -21.68,-24.73 -19.68,-24.73 -17.68,-24.73 -1.68,-24.73 0.32,-24.73 2.32,-24.73 18.32,-24.73 20.32,-24.73 22.32,-24.73 -42.68,-22.73 -22.68,-22.73 -20.68,-22.73 -18.68,-22.73 -16.68,-22.73 -2.68,-22.73 -0.68,-22.73 1.32,-22.73 3.32,-22.73 17.32,-22.73 19.32,-22.73 21.32,-22.73 23.32,-22.73 43.32,-22.73 -41.68,-20.73 -21.68,-20.73 -19.68,-20.73 -17.68,-20.73 -1.68,-20.73 0.32,-20.73 2.32,-20.73 18.32,-20.73 20.32,-20.73 42.32,-20.73 44.32,-20.73 -42.68,-18.73 -36.68,-18.73 -22.68,-18.73 -20.68,-18.73 -18.68,-18.73 -16.68,-18.73 -2.68,-18.73 -0.68,-18.73 3.32,-18.73 17.32,-18.73 19.32,-18.73 23.32,-18.73 37.32,-18.73 43.32,-18.73 45.32,-18.73 47.32,-18.73 -41.68,-16.73 -39.68,-16.73 -37.68,-16.73 -21.68,-16.73 -17.68,-16.73 0.32,-16.73 2.32,-16.73 18.32,-16.73 20.32,-16.73 22.32,-16.73 38.32,-16.73 40.32,-16.73 42.32,-16.73 44.32,-16.73 46.32,-16.73 48.32,-16.73 50.32,-16.73 52.32,-16.73 -42.68,-14.73 -40.68,-14.73 -38.68,-14.73 -36.68,-14.73 -22.68,-14.73 -20.68,-14.73 -16.68,-14.73 -2.68,-14.73 3.32,-14.73 17.32,-14.73 19.32,-14.73 23.32,-14.73 37.32,-14.73 39.32,-14.73 41.32,-14.73 43.32,-14.73 45.32,-14.73 47.32,-14.73 49.32,-14.73 51.32,-14.73 -43.68,-12.73 -41.68,-12.73 -39.68,-12.73 -37.68,-12.73 -35.68,-12.73 -33.68,-12.73 -31.68,-12.73 -29.68,-12.73 -27.68,-12.73 -25.68,-12.73 -23.68,-12.73 -21.68,-12.73 -19.68,-12.73 -1.68,-12.73 0.32,-12.73 2.32,-12.73 20.32,-12.73 22.32,-12.73 24.32,-12.73 26.32,-12.73 28.32,-12.73 30.32,-12.73 32.32,-12.73 34.32,-12.73 36.32,-12.73 38.32,-12.73 40.32,-12.73 42.32,-12.73 44.32,-12.73 46.32,-12.73 48.32,-12.73 50.32,-12.73 52.32,-12.73 -44.68,-10.73 -42.68,-10.73 -40.68,-10.73 -38.68,-10.73 -34.68,-10.73 -32.68,-10.73 -22.68,-10.73 -20.68,-10.73 -18.68,-10.73 -14.68,-10.73 -12.68,-10.73 7.32,-10.73 13.32,-10.73 15.32,-10.73 19.32,-10.73 21.32,-10.73 23.32,-10.73 27.32,-10.73 33.32,-10.73 37.32,-10.73 39.32,-10.73 41.32,-10.73 43.32,-10.73 45.32,-10.73 47.32,-10.73 49.32,-10.73 51.32,-10.73 -51.68,-8.73 -49.68,-8.73 -47.68,-8.73 -45.68,-8.73 -43.68,-8.73 -41.68,-8.73 -39.68,-8.73 -35.68,-8.73 -23.68,-8.73 -21.68,-8.73 -19.68,-8.73 -17.68,-8.73 -15.68,-8.73 -3.68,-8.73 -1.68,-8.73 0.32,-8.73 4.32,-8.73 16.32,-8.73 20.32,-8.73 22.32,-8.73 24.32,-8.73 36.32,-8.73 38.32,-8.73 40.32,-8.73 42.32,-8.73 44.32,-8.73 46.32,-8.73 48.32,-8.73 50.32,-8.73 52.32,-8.73 -52.68,-6.73 -50.68,-6.73 -48.68,-6.73 -46.68,-6.73 -44.68,-6.73 -42.68,-6.73 -40.68,-6.73 -38.68,-6.73 -36.68,-6.73 -22.68,-6.73 -20.68,-6.73 -18.68,-6.73 -16.68,-6.73 17.32,-6.73 21.32,-6.73 23.32,-6.73 37.32,-6.73 39.32,-6.73 41.32,-6.73 43.32,-6.73 45.32,-6.73 47.32,-6.73 49.32,-6.73 51.32,-6.73 -51.68,-4.73 -49.68,-4.73 -47.68,-4.73 -45.68,-4.73 -43.68,-4.73 -41.68,-4.73 -39.68,-4.73 -21.68,-4.73 -19.68,-4.73 -17.68,-4.73 -1.68,-4.73 0.32,-4.73 18.32,-4.73 20.32,-4.73 22.32,-4.73 40.32,-4.73 42.32,-4.73 44.32,-4.73 46.32,-4.73 48.32,-4.73 50.32,-4.73 52.32,-4.73 -52.68,-2.73 -50.68,-2.73 -48.68,-2.73 -46.68,-2.73 -44.68,-2.73 -42.68,-2.73 -40.68,-2.73 -38.68,-2.73 -36.68,-2.73 -22.68,-2.73 -20.68,-2.73 -18.68,-2.73 -16.68,-2.73 17.32,-2.73 21.32,-2.73 23.32,-2.73 37.32,-2.73 39.32,-2.73 41.32,-2.73 43.32,-2.73 45.32,-2.73 47.32,-2.73 49.32,-2.73 51.32,-2.73 -51.68,-0.73 -49.68,-0.73 -47.68,-0.73 -45.68,-0.73 -43.68,-0.73 -41.68,-0.73 -39.68,-0.73 -21.68,-0.73 -19.68,-0.73 -1.68,-0.73 0.32,-0.73 18.32,-0.73 20.32,-0.73 40.32,-0.73 42.32,-0.73 44.32,-0.73 46.32,-0.73 48.32,-0.73 50.32,-0.73 52.32,-0.73 -52.68,1.27 -50.68,1.27 -48.68,1.27 -46.68,1.27 -44.68,1.27 -42.68,1.27 -40.68,1.27 -38.68,1.27 -36.68,1.27 -22.68,1.27 -20.68,1.27 -18.68,1.27 -16.68,1.27 17.32,1.27 23.32,1.27 37.32,1.27 39.32,1.27 41.32,1.27 43.32,1.27 45.32,1.27 47.32,1.27 49.32,1.27 51.32,1.27 -51.68,3.27 -49.68,3.27 -47.68,3.27 -45.68,3.27 -43.68,3.27 -41.68,3.27 -39.68,3.27 -23.68,3.27 -21.68,3.27 -19.68,3.27 0.32,3.27 16.32,3.27 18.32,3.27 20.32,3.27 36.32,3.27 40.32,3.27 42.32,3.27 44.32,3.27 46.32,3.27 48.32,3.27 50.32,3.27 52.32,3.27 -52.68,5.27 -50.68,5.27 -48.68,5.27 -46.68,5.27 -44.68,5.27 -42.68,5.27 -40.68,5.27 -38.68,5.27 -36.68,5.27 -34.68,5.27 -32.68,5.27 -22.68,5.27 -20.68,5.27 -18.68,5.27 -16.68,5.27 -14.68,5.27 -12.68,5.27 -6.68,5.27 -0.68,5.27 1.32,5.27 7.32,5.27 13.32,5.27 15.32,5.27 17.32,5.27 23.32,5.27 25.32,5.27 27.32,5.27 33.32,5.27 35.32,5.27 37.32,5.27 39.32,5.27 41.32,5.27 43.32,5.27 45.32,5.27 47.32,5.27 49.32,5.27 51.32,5.27 -51.68,7.27 -49.68,7.27 -47.68,7.27 -45.68,7.27 -43.68,7.27 -41.68,7.27 -39.68,7.27 -35.68,7.27 -33.68,7.27 -31.68,7.27 -27.68,7.27 -25.68,7.27 -23.68,7.27 -19.68,7.27 -15.68,7.27 -13.68,7.27 -11.68,7.27 -7.68,7.27 4.32,7.27 10.32,7.27 12.32,7.27 14.32,7.27 16.32,7.27 20.32,7.27 22.32,7.27 24.32,7.27 26.32,7.27 30.32,7.27 32.32,7.27 34.32,7.27 36.32,7.27 40.32,7.27 42.32,7.27 44.32,7.27 46.32,7.27 48.32,7.27 50.32,7.27 52.32,7.27 -52.68,9.27 -50.68,9.27 -48.68,9.27 -46.68,9.27 -44.68,9.27 -42.68,9.27 -40.68,9.27 -38.68,9.27 -36.68,9.27 -34.68,9.27 -32.68,9.27 -26.68,9.27 -24.68,9.27 -22.68,9.27 -18.68,9.27 -14.68,9.27 -12.68,9.27 -6.68,9.27 7.32,9.27 11.32,9.27 13.32,9.27 15.32,9.27 21.32,9.27 23.32,9.27 25.32,9.27 27.32,9.27 31.32,9.27 33.32,9.27 35.32,9.27 37.32,9.27 39.32,9.27 41.32,9.27 43.32,9.27 45.32,9.27 47.32,9.27 49.32,9.27 -51.68,11.27 -49.68,11.27 -47.68,11.27 -45.68,11.27 -43.68,11.27 -41.68,11.27 -39.68,11.27 -35.68,11.27 -33.68,11.27 -31.68,11.27 -29.68,11.27 -27.68,11.27 -25.68,11.27 -23.68,11.27 -21.68,11.27 -19.68,11.27 2.32,11.27 4.32,11.27 10.32,11.27 12.32,11.27 16.32,11.27 18.32,11.27 20.32,11.27 22.32,11.27 24.32,11.27 26.32,11.27 28.32,11.27 30.32,11.27 32.32,11.27 34.32,11.27 36.32,11.27 40.32,11.27 42.32,11.27 44.32,11.27 -52.68,13.27 -50.68,13.27 -48.68,13.27 -46.68,13.27 -44.68,13.27 -42.68,13.27 -40.68,13.27 -38.68,13.27 -34.68,13.27 -32.68,13.27 -28.68,13.27 -26.68,13.27 -24.68,13.27 -22.68,13.27 -20.68,13.27 -18.68,13.27 15.32,13.27 17.32,13.27 21.32,13.27 23.32,13.27 25.32,13.27 27.32,13.27 29.32,13.27 31.32,13.27 33.32,13.27 35.32,13.27 39.32,13.27 41.32,13.27 43.32,13.27 -51.68,15.27 -49.68,15.27 -47.68,15.27 -45.68,15.27 -43.68,15.27 -41.68,15.27 -39.68,15.27 -37.68,15.27 -35.68,15.27 -31.68,15.27 -29.68,15.27 -27.68,15.27 -25.68,15.27 -23.68,15.27 -21.68,15.27 -19.68,15.27 -17.68,15.27 -15.68,15.27 -13.68,15.27 -11.68,15.27 -9.68,15.27 -5.68,15.27 -3.68,15.27 -1.68,15.27 38.32,15.27 40.32,15.27 42.32,15.27 -52.68,17.27 -50.68,17.27 -48.68,17.27 -46.68,17.27 -44.68,17.27 -42.68,17.27 -36.68,17.27 -34.68,17.27 -28.68,17.27 -26.68,17.27 -24.68,17.27 -22.68,17.27 -20.68,17.27 -18.68,17.27 -16.68,17.27 -14.68,17.27 -12.68,17.27 -8.68,17.27 -6.68,17.27 -4.68,17.27 -2.68,17.27 -0.68,17.27 1.32,17.27 13.32,17.27 17.32,17.27 23.32,17.27 29.32,17.27 31.32,17.27 33.32,17.27 35.32,17.27 37.32,17.27 -45.68,19.27 -43.68,19.27 -37.68,19.27 -35.68,19.27 -33.68,19.27 -31.68,19.27 -27.68,19.27 -25.68,19.27 -23.68,19.27 -21.68,19.27 -19.68,19.27 -17.68,19.27 -15.68,19.27 -13.68,19.27 -11.68,19.27 -7.68,19.27 -5.68,19.27 -3.68,19.27 -1.68,19.27 0.32,19.27 2.32,19.27 4.32,19.27 6.32,19.27 8.32,19.27 14.32,19.27 20.32,19.27 22.32,19.27 26.32,19.27 28.32,19.27 30.32,19.27 32.32,19.27 34.32,19.27 36.32,19.27 42.32,19.27 -44.68,21.27 -42.68,21.27 -34.68,21.27 -32.68,21.27 -30.68,21.27 -24.68,21.27 -22.68,21.27 -20.68,21.27 -18.68,21.27 -16.68,21.27 -14.68,21.27 -12.68,21.27 -8.68,21.27 -6.68,21.27 -4.68,21.27 -2.68,21.27 -0.68,21.27 1.32,21.27 3.32,21.27 5.32,21.27 7.32,21.27 9.32,21.27 11.32,21.27 13.32,21.27 23.32,21.27 25.32,21.27 27.32,21.27 29.32,21.27 31.32,21.27 33.32,21.27 35.32,21.27 -43.68,23.27 -33.68,23.27 -31.68,23.27 -29.68,23.27 -27.68,23.27 -23.68,23.27 -21.68,23.27 -19.68,23.27 -17.68,23.27 -15.68,23.27 -13.68,23.27 -11.68,23.27 -7.68,23.27 -5.68,23.27 -3.68,23.27 -1.68,23.27 0.32,23.27 2.32,23.27 4.32,23.27 6.32,23.27 8.32,23.27 12.32,23.27 26.32,23.27 30.32,23.27 32.32,23.27 34.32,23.27 -42.68,25.27 -34.68,25.27 -32.68,25.27 -30.68,25.27 -28.68,25.27 -26.68,25.27 -20.68,25.27 -18.68,25.27 -16.68,25.27 -14.68,25.27 -12.68,25.27 -6.68,25.27 -4.68,25.27 -2.68,25.27 -0.68,25.27 1.32,25.27 3.32,25.27 5.32,25.27 11.32,25.27 17.32,25.27 29.32,25.27 31.32,25.27 33.32,25.27 35.32,25.27 -41.68,27.27 -35.68,27.27 -33.68,27.27 -31.68,27.27 -29.68,27.27 -27.68,27.27 -25.68,27.27 -23.68,27.27 8.32,27.27 30.32,27.27 32.32,27.27 34.32,27.27 36.32,27.27 42.32,27.27
  other v2: -7.4,-12 7.4,-12 3.7,-11.2 -7.3,-11 -27.7,-10.7 -3.5,-10.6 -5.4,-10.2 -37.4,-9.3 -13.1,-9.1 -30.1,-9 -10.6,-9 -7,-8.9 1.8,-7 -3.4,-4.8 2,-2.9 -3.2,-0.3 1.9,0.9 -3.5,2.1 3.5,2.2 -1.5,2.3 5.1,3.9 -4.3,5.1 -2.1,5.1 4,5.2 -17.1,8.5 -17.6,10.7 -14.8,10.8 -6.7,10.8 7.4,10.8 -4.1,11.1 -15.9,12.2 -4.2,12.2 -7.3,12.3 3.531,12.776 9.169,13.386 6.299,13.538 11.862,13.589 10.084,14.275 4.978,14.351 13.945,14.351 29.591,14.503 24.3,15.6 15.3,16.3 19.558,16.358 18.3,16.4 22,16.4 20.7,17.8 11.3,18.2 11.8,19.1 16.6,22.3 10.4,22.9 14,22.9 20,23.7 14,24.3 16.5,25 14,26.3 16.7,26.3 19.7,26.3 26,28.1 28.5,28.1 -29.337,28.169 -27.457,28.169 -25.578,28.169 -23.698,28.169 -21.819,28.169 -19.939,28.169 -18.059,28.169 -16.18,28.169 -14.3,28.169 -12.421,28.169 -10.541,28.169 12.014,28.169 13.894,28.169 15.773,28.169 17.653,28.169 19.533,28.169 21.412,28.169 23.292,28.169
LED1: IC1.4 LD1.2 | length 103.2
  TopLayer w0.127: LD1.2 -36,-11.5 -38.1,-9.4 -38.1,11.3 -21.79,27.61 6.567,27.61 8.288,25.889 9.557,25.889 11.368,27.7 22.395,27.7 23,27.095 23,24.35 22.325,23.675 IC1.4
LED2: IC1.5 LD2.2 | length 55.3
  TopLayer w0.127: LD2.2 -10.825,25.975 -10.1,26.7 6.244,26.7 7.925,25.019 9.931,25.019 11.712,26.8 17.6,26.8 20.075,24.325 IC1.5
LED3: IC1.6 LD3.2 | length 119.3
  TopLayer w0.127: LD3.2 -16,-11.5 -17.8,-9.7 -36.2,-9.7 -37.5,-8.4 -37.5,11.2 -21.385,27.315 6.467,27.315 8.179,25.603 9.677,25.603 11.495,27.421 22.279,27.421 22.7,27 22.7,25.5 22.175,24.975 IC1.6
LED4: IC1.7 LD4.2 | length 69.8
  TopLayer w0.127: LD4.2 -30.825,17.175 -21,27 6.376,27 8.052,25.324 9.83,25.324 11.606,27.1 17.9,27.1 19.375,25.625 IC1.7
LED5: IC1.14 LD5.2 | length 43.6
  TopLayer w0.127: LD5.2 16,-11.5 19.05,-8.45 19.05,16.942 17.9,18.092 17.9,22.35 17.225,23.025 IC1.14
LED6: IC1.13 LD6.2 | length 29.7
  TopLayer w0.127: IC1.13 17.117,23.675 18.339,22.454 18.339,18.261 22,14.6 28.8,14.6 30.825,12.575 LD6.2
LED7: IC1.12 LD7.2 | length 60.2
  TopLayer w0.127: IC1.12 17.066,24.325 18.796,22.595 18.796,18.404 22.2,15 36,15 38.7,12.3 38.7,-7.5 34.7,-11.5 LD7.2
LED8: IC1.11 LD8.2 | length 22.5
  TopLayer w0.127: LD8.2 10.825,22.525 13.275,24.975 IC1.11
NetB1_1: B1.1 C3.1 R3.1 | length 6.3
  TopLayer w0.508: B1.1 C3.1 40.95,19.75 R3.1
NetB2_1: B2.1 C4.1 R4.1 | length 6.2
  TopLayer w0.508: C4.1 -40.95,19.8 R4.1 B2.1
NetB3_1: B3.1 C5.1 R13.1 | length 6.3
  TopLayer w0.508: B3.1 C5.1 40.95,-19.75 R13.1
NetB4_1: B4.1 C6.1 R14.1 | length 6.3
  TopLayer w0.508: R14.1 -40.95,-19.75 C6.1 B4.1
NetLD1_1: LD1.1 R5.1 | length 2.9
  TopLayer w0.127: LD1.1 R5.1
NetLD2_1: LD2.1 R6.1 | length 2.3
  TopLayer w0.127: R6.1 -9.2,5.525 LD2.1
NetLD3_1: LD3.1 R7.1 | length 2.9
  TopLayer w0.127: LD3.1 R7.1
NetLD4_1: LD4.1 R8.1 | length 2.3
  TopLayer w0.127: R8.1 -29.2,5.525 LD4.1
NetLD5_1: LD5.1 R9.1 | length 2.9
  TopLayer w0.127: R9.1 LD5.1
NetLD6_1: LD6.1 R10.1 | length 2.3
  TopLayer w0.127: LD6.1 29.2,5.525 R10.1
NetLD7_1: LD7.1 R11.1 | length 2.9
  TopLayer w0.127: R11.1 LD7.1
NetLD8_1: LD8.1 R12.1 | length 2.3
  TopLayer w0.127: LD8.1 9.175,7.775 R12.1
NetR1_1: R1.1 SW1.1 | length 2.2
  TopLayer w0.254: R1.1 SW1.1
NetR2_1: R2.1 SW1.2 | length 2.2
  TopLayer w0.254: R2.1 SW1.2
pads on no net: IC1.9 IC1.10 J17.MTG1 J17.MTG2 Standoff1.1 Standoff2.1 Standoff3.1 Standoff4.1

## Polygon pours and split planes (outlines as drawn)
GND on BottomLayer "L3-No Net" (solid, remove dead copper, pour order 142): -58.85,-31 -58.85,31.25 58.85,31.25 58.85,-31
DAC_OUT3_N on BottomLayer "DAC_OUT3_N_L02_P141" (solid, pour order 141): -16,-14.6 cw(c-15,-14.6) -15,-13.6 -5,-13.6 cw(c-5,-14.6) -4,-14.6 -4,-24.4 cw(c-5,-24.4) -5,-25.4 -15,-25.4 cw(c-15,-24.4) -16,-24.4
DAC_OUT5_N on BottomLayer "DAC_OUT5_N_L02_P140" (solid, pour order 140): 4,-14.6 cw(c5,-14.6) 5,-13.6 15,-13.6 cw(c15,-14.6) 16,-14.6 16,-24.4 cw(c15,-24.4) 15,-25.4 5,-25.4 cw(c5,-24.4) 4,-24.4
DAC_OUT7_N on BottomLayer "DAC_OUT7_N_L02_P139" (solid, pour order 139): 24,-14.6 cw(c25,-14.6) 25,-13.6 35,-13.6 cw(c35,-14.6) 36,-14.6 36,-24.4 cw(c35,-24.4) 35,-25.4 25,-25.4 cw(c25,-24.4) 24,-24.4
DAC_OUT6_N on BottomLayer "DAC_OUT6_N_L02_P138" (solid, pour order 138): 24,2.4 cw(c25,2.4) 25,3.4 35,3.4 cw(c35,2.4) 36,2.4 36,-7.4 cw(c35,-7.4) 35,-8.4 25,-8.4 cw(c25,-7.4) 24,-7.4
DAC_OUT8_N on BottomLayer "DAC_OUT8_N_L02_P137" (solid, pour order 137): 4,2.4 cw(c5,2.4) 5,3.4 15,3.4 cw(c15,2.4) 16,2.4 16,-7.4 cw(c15,-7.4) 15,-8.4 5,-8.4 cw(c5,-7.4) 4,-7.4
DAC_OUT2_N on BottomLayer "DAC_OUT2_N_L02_P136" (solid, pour order 136): -16,2.4 cw(c-15,2.4) -15,3.4 -5,3.4 cw(c-5,2.4) -4,2.4 -4,-7.4 cw(c-5,-7.4) -5,-8.4 -15,-8.4 cw(c-15,-7.4) -16,-7.4
DAC_OUT4_N on BottomLayer "DAC_OUT4_N_L02_P130" (solid, pour order 130): -36,2.4 cw(c-35,2.4) -35,3.4 -25,3.4 cw(c-25,2.4) -24,2.4 -24,-7.4 cw(c-25,-7.4) -25,-8.4 -35,-8.4 cw(c-35,-7.4) -36,-7.4
DAC_OUT1_N on BottomLayer "DAC_OUT1_N_L02_P126" (solid, pour order 126): -36,-14.6 cw(c-35,-14.6) -35,-13.6 -25,-13.6 cw(c-25,-14.6) -24,-14.6 -24,-24.4 cw(c-25,-24.4) -25,-25.4 -35,-25.4 cw(c-35,-24.4) -36,-24.4
GND on TopLayer "L3-No Net" (solid, remove dead copper, pour order 117): -58.646,-30.918 -58.611,31.082 58.97,31.082 59.068,-30.918

## Silkscreen, mask and mechanical layers (free items; w line width, h text height)
TopOverlay:
  text "eSAS BNC/MCX adapter v1.0" at -12.402,16.4 h2
  text "BNC4" at -33.5,-10.5 h2
  text "BNC2" at -13.5,-10.5 h2
  text "BNC8" at 6.5,-10.5 h2
  text "BNC6" at 26.5,-10.5 h2
  text "BNC1" at -33.5,-27.5 h2
  text "BNC3" at -13.5,-27.5 h2
  text "BNC5" at 6.5,-27.5 h2
  text "BNC7" at 26.5,-27.5 h2
Mechanical1:
  lines w0.1: -53.629,-7.921 ccw(c-51.825,-7.825) -51.73,-9.629 ; -53.629,16.921 cw(c-51.826,16.825) -51.73,18.629 ; -53.627,-8 -53.627,17 ; -51.692,-9.628 cw(c-51.476,-17.476) -43.628,-17.26 ; -51.651,18.627 ccw(c-51.651,26.651) -43.627,26.651 ; -43.629,26.73 cw(c-41.825,26.826) -41.921,28.629 ; -43.627,-27 ccw(c-42,-27) -42,-28.627 42,-28.627 ; -43.628,-26.986 -43.628,-17.288 ; -42,28.627 42,28.627 ; 41.921,-28.629 ccw(c41.825,-26.825) 43.629,-26.73 ; 42,28.627 cw(c42,27) 43.627,27 ; 43.627,-26.73 cw(c51.651,-26.651) 51.73,-18.627 ; 43.628,17.261 ccw(c51.476,17.476) 51.692,9.628 ; 43.627,17.302 43.627,27 ; 51.73,-18.629 ccw(c51.826,-16.825) 53.629,-16.921 ; 51.73,9.629 cw(c51.826,7.825) 53.623,8 ; 53.627,-16.921 53.627,8
Mechanical4:
  lines w0.254: -36.25,-18 44.75,-18
Mechanical8:
  circle w0.127: c0,0 r2
  lines w0.1: -50.842,25.109 -44.568,25.109 ; -50.283,-127.768 50.682,-127.768 ; -50.08,25.109 -50.08,28.67 -50.08,-30.06 ccw(c-47.014,-30.06) -49.182,-32.228 ; 49.92,-131.33 49.92,-127.768
  lines w0.127: -3.2,0 0,0 ; 0,-3.2 0,0 ; 0,3.2 0,0 ; 3.2,0 0,0

## Text inside footprints (layer, text, board x,y; h text height)
J17: Mechanical14 "B1" at 7.4,5.3 h1.2 r180; Mechanical14 "A1" at 6.55,11.95 h1.2 r180; BottomOverlay "B1" at 7.4,5.3 h1.2 r180; BottomOverlay "A1" at 6.55,11.95 h1.2 r180; Mechanical8 "PCB Edge" at -4.025,30.7 h1.2 r180
SW1: BottomOverlay "1" at 23.115,29.875 h1 r180; BottomOverlay "2" at 31.025,29.8 h1 r180